# Altium PCB PCB.PcbDoc (part 11 of 11)
Units mm, origin at the board's own origin, x right, y up, seen from the top; angles counter-clockwise.
Board outline 100.46 x 70.51 mm, 10 copper layers (L1(SIG), L2(GND), L3(PWR), L4(SIG), L5(GND), L6(SIG), L7(GND), L8(SIG), L9(GND), L10(SIG)), stack 1.49 mm thick; 425 components, 324 nets, 2004 pads, 1425 vias.
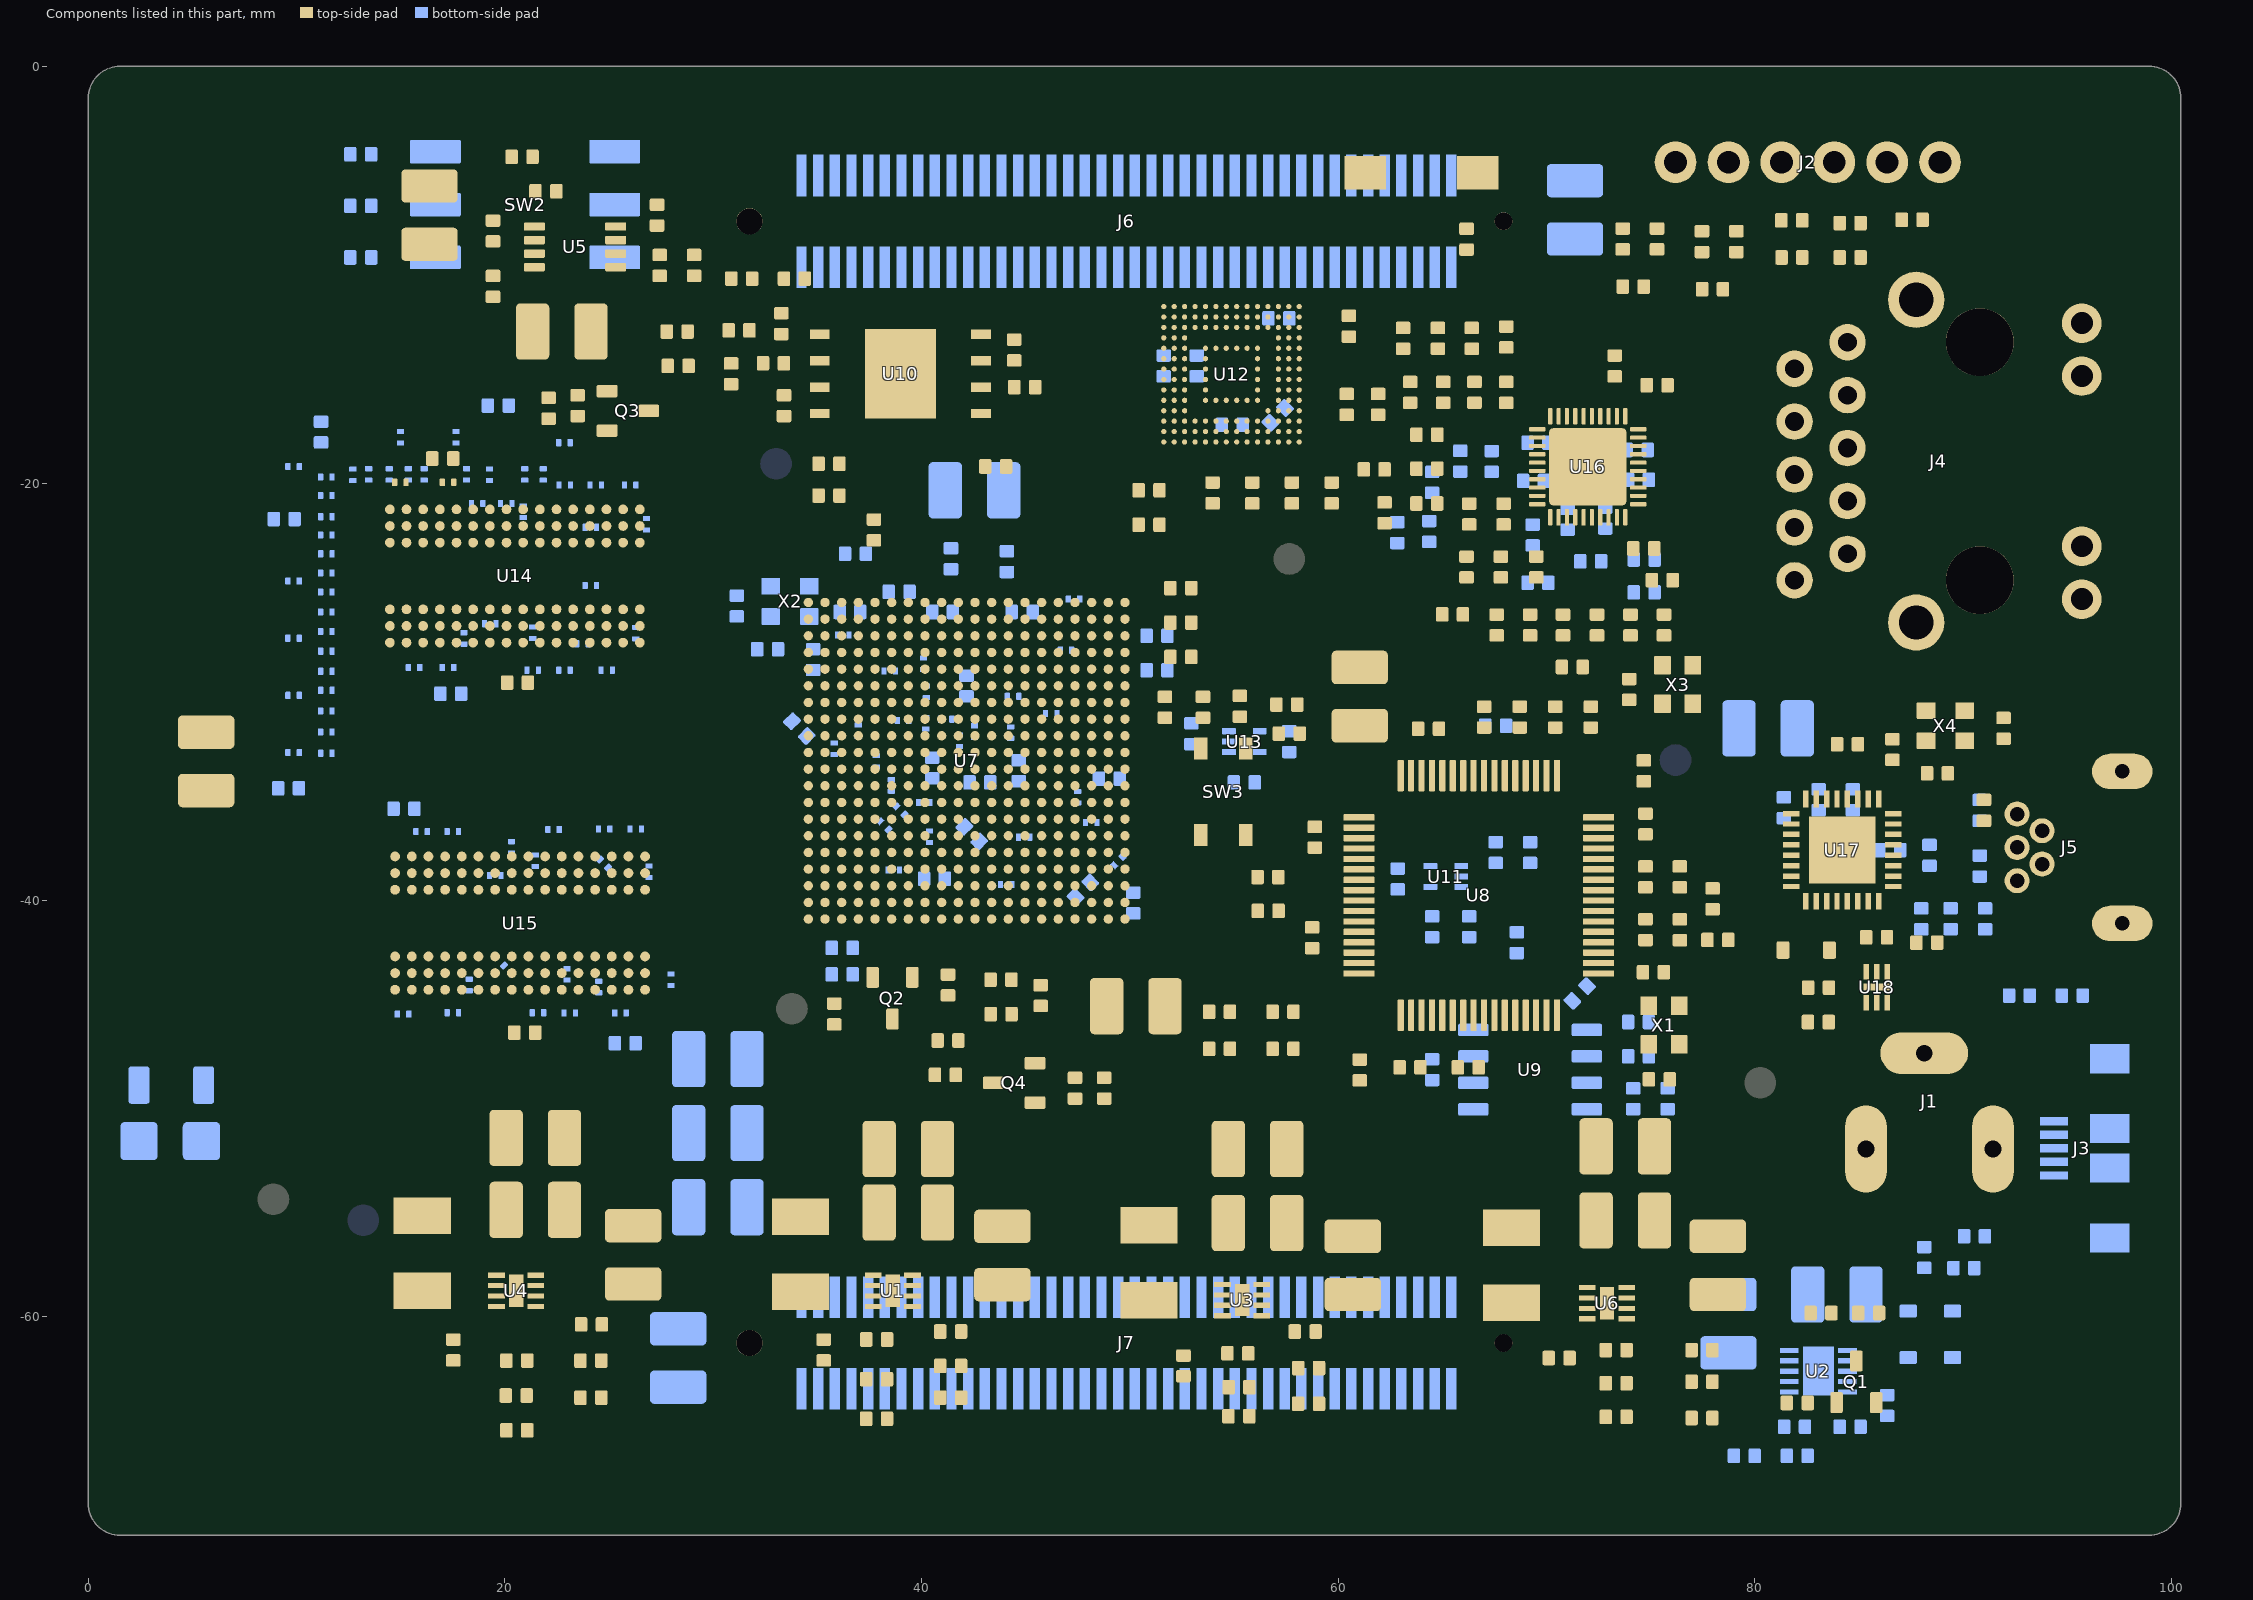
[diagram p18: the components of this part, seen from the top]

## Polygon pours and split planes (outlines as drawn) (continued)
CGND on L2(GND) "GROUND RING L2" (solid, remove dead copper, pour order 71): 89.406,-70.485 99.383,-70.485 ccw(c99.384,-68.965) 100.904,-68.965 100.904,-13.081 100.457,-13.081 100.457,-1.074 ccw(c98.937,-1.074) 98.937,0.447 88.138,0.447 1.52,0.447 ccw(c1.52,-1.073) 0,-1.073 0,-1.074 0,-8.255 -0.193,-8.255 -0.193,-68.714 -0.193,-68.715 ccw(c1.327,-68.715) 1.328,-70.235 87.887,-70.235 87.882,-67.695 11.218,-67.695 cw(c13.387,-64.071) 9.589,-65.917 9.588,-63.377 ccw(c7.048,-63.377) 7.048,-60.837 4.127,-60.837 cw(c4.032,-59.09) 3.312,-60.684 3.242,-10.083 cw(c6.163,-13.133) 4.318,-9.335 6.858,-9.335 ccw(c6.858,-6.794) 9.398,-6.794 9.398,-3.873 cw(c11.144,-3.778) 9.551,-3.058 90.818,-2.946 cw(c89.154,-3.873) 91.059,-3.873 91.059,-6.795 ccw(c93.599,-6.794) 93.599,-9.335 96.139,-9.335 cw(c94.295,-13.132) 97.446,-10.323 97.446,-17.143 97.465,-17.143 97.465,-60.448 cw(c95.717,-58.964) 96.584,-61.087 93.662,-61.087 ccw(c93.663,-63.627) 91.123,-63.627 91.122,-66.167 cw(c87.324,-64.322) 89.493,-67.945 89.411,-67.945
GND on L2(GND) "L2 GND Plane" (solid, remove dead copper, pour order 132): 0.004,-68.965 0.004,-1.947 0.004,-1.491 cw(c1.524,-1.491) 1.524,0.029 98.939,0.029 cw(c98.939,-1.491) 100.459,-1.491 100.459,-68.965 cw(c98.939,-68.965) 98.939,-70.485 1.524,-70.485 cw(c1.524,-68.965)
GND on L7(GND) "GND_L07_P151" (solid, remove dead copper, pour order 151): 0.004,-68.965 0.004,-1.947 0.004,-1.491 cw(c1.524,-1.491) 1.524,0.029 98.939,0.029 cw(c98.939,-1.491) 100.459,-1.491 100.459,-68.965 cw(c98.939,-68.965) 98.939,-70.485 1.524,-70.485 cw(c1.524,-68.965)
CGND on L7(GND) "GROUND RING L7" (solid, remove dead copper, pour order 121): 89.406,-70.485 99.383,-70.485 ccw(c99.384,-68.965) 100.904,-68.965 100.904,-13.081 100.457,-13.081 100.457,-1.074 ccw(c98.937,-1.074) 98.937,0.447 88.138,0.447 1.52,0.447 ccw(c1.52,-1.073) 0,-1.073 0,-1.074 0,-8.255 -0.193,-8.255 -0.193,-68.714 -0.193,-68.715 ccw(c1.327,-68.715) 1.328,-70.235 87.887,-70.235 87.882,-67.695 11.218,-67.695 cw(c13.387,-64.071) 9.589,-65.917 9.588,-63.377 ccw(c7.048,-63.377) 7.048,-60.837 4.127,-60.837 cw(c4.032,-59.09) 3.312,-60.684 3.242,-10.083 cw(c6.163,-13.133) 4.318,-9.335 6.858,-9.335 ccw(c6.858,-6.794) 9.398,-6.794 9.398,-3.873 cw(c11.144,-3.778) 9.551,-3.058 90.818,-2.946 cw(c89.154,-3.873) 91.059,-3.873 91.059,-6.795 ccw(c93.599,-6.794) 93.599,-9.335 96.139,-9.335 cw(c94.295,-13.132) 97.446,-10.323 97.446,-17.143 97.465,-17.143 97.465,-60.448 cw(c95.717,-58.964) 96.584,-61.087 93.662,-61.087 ccw(c93.663,-63.627) 91.123,-63.627 91.122,-66.167 cw(c87.324,-64.322) 89.493,-67.945 89.411,-67.945
GND on L6(SIG) "GND_L06_P148" (solid, remove dead copper, pour order 148): 0.004,-68.965 0.004,-1.947 0.004,-1.491 cw(c1.524,-1.491) 1.524,0.029 98.939,0.029 cw(c98.939,-1.491) 100.459,-1.491 100.459,-68.965 cw(c98.939,-68.965) 98.939,-70.485 1.524,-70.485 cw(c1.524,-68.965)
CGND on L6(SIG) "GROUND RING L6" (solid, remove dead copper, pour order 122): 89.406,-70.485 99.383,-70.485 ccw(c99.384,-68.965) 100.904,-68.965 100.904,-13.081 100.457,-13.081 100.457,-1.074 ccw(c98.937,-1.074) 98.937,0.447 88.138,0.447 1.52,0.447 ccw(c1.52,-1.073) 0,-1.073 0,-1.074 0,-8.255 -0.193,-8.255 -0.193,-68.714 -0.193,-68.715 ccw(c1.327,-68.715) 1.328,-70.235 87.887,-70.235 87.882,-67.695 11.218,-67.695 cw(c13.387,-64.071) 9.589,-65.917 9.588,-63.377 ccw(c7.048,-63.377) 7.048,-60.837 4.127,-60.837 cw(c4.032,-59.09) 3.312,-60.684 3.242,-10.083 cw(c6.163,-13.133) 4.318,-9.335 6.858,-9.335 ccw(c6.858,-6.794) 9.398,-6.794 9.398,-3.873 cw(c11.144,-3.778) 9.551,-3.058 90.818,-2.946 cw(c89.154,-3.873) 91.059,-3.873 91.059,-6.795 ccw(c93.599,-6.794) 93.599,-9.335 96.139,-9.335 cw(c94.295,-13.132) 97.446,-10.323 97.446,-17.143 97.465,-17.143 97.465,-60.448 cw(c95.717,-58.964) 96.584,-61.087 93.662,-61.087 ccw(c93.663,-63.627) 91.123,-63.627 91.122,-66.167 cw(c87.324,-64.322) 89.493,-67.945 89.411,-67.945
GND on L5(GND) "GND_L05_P150" (solid, remove dead copper, pour order 150): 0.004,-68.965 0.004,-1.947 0.004,-1.491 cw(c1.524,-1.491) 1.524,0.029 98.939,0.029 cw(c98.939,-1.491) 100.459,-1.491 100.459,-68.965 cw(c98.939,-68.965) 98.939,-70.485 1.524,-70.485 cw(c1.524,-68.965)
CGND on L5(GND) "GROUND RING L5" (solid, remove dead copper, pour order 126): 89.691,-70.516 99.668,-70.516 ccw(c99.669,-68.996) 101.189,-68.996 101.189,-13.112 100.742,-13.112 100.742,-1.105 ccw(c99.222,-1.105) 99.222,0.416 88.423,0.416 1.805,0.416 ccw(c1.805,-1.104) 0.285,-1.104 0.285,-1.105 0.285,-8.286 0.092,-8.286 0.092,-68.745 0.092,-68.746 ccw(c1.612,-68.746) 1.613,-70.266 88.172,-70.266 88.167,-67.726 11.503,-67.726 cw(c13.672,-64.102) 9.874,-65.948 9.874,-63.408 ccw(c7.333,-63.408) 7.334,-60.868 4.413,-60.868 cw(c4.317,-59.121) 3.597,-60.715 3.527,-10.114 cw(c6.448,-13.164) 4.603,-9.366 7.143,-9.366 ccw(c7.143,-6.825) 9.683,-6.826 9.683,-3.905 cw(c11.429,-3.809) 9.836,-3.089 91.103,-2.977 cw(c89.439,-3.905) 91.344,-3.905 91.344,-6.826 ccw(c93.884,-6.825) 93.884,-9.366 96.424,-9.366 cw(c94.58,-13.163) 97.731,-10.354 97.731,-17.174 97.75,-17.174 97.75,-60.479 cw(c96.002,-58.995) 96.869,-61.118 93.947,-61.118 ccw(c93.948,-63.658) 91.408,-63.658 91.407,-66.198 cw(c87.609,-64.353) 89.778,-67.976 89.696,-67.976
CGND on L5(GND) "GROUND RING L5" (solid, remove dead copper, pour order 124): 89.406,-70.485 99.383,-70.485 ccw(c99.384,-68.965) 100.904,-68.965 100.904,-13.081 100.457,-13.081 100.457,-1.074 ccw(c98.937,-1.074) 98.937,0.447 88.138,0.447 1.52,0.447 ccw(c1.52,-1.073) 0,-1.073 0,-1.074 0,-8.255 -0.193,-8.255 -0.193,-68.714 -0.193,-68.715 ccw(c1.327,-68.715) 1.328,-70.235 87.887,-70.235 87.882,-67.695 11.218,-67.695 cw(c13.387,-64.071) 9.589,-65.917 9.588,-63.377 ccw(c7.048,-63.377) 7.048,-60.837 4.127,-60.837 cw(c4.032,-59.09) 3.312,-60.684 3.242,-10.083 cw(c6.163,-13.133) 4.318,-9.335 6.858,-9.335 ccw(c6.858,-6.794) 9.398,-6.794 9.398,-3.873 cw(c11.144,-3.778) 9.551,-3.058 90.818,-2.946 cw(c89.154,-3.873) 91.059,-3.873 91.059,-6.795 ccw(c93.599,-6.794) 93.599,-9.335 96.139,-9.335 cw(c94.295,-13.132) 97.446,-10.323 97.446,-17.143 97.465,-17.143 97.465,-60.448 cw(c95.717,-58.964) 96.584,-61.087 93.662,-61.087 ccw(c93.663,-63.627) 91.123,-63.627 91.122,-66.167 cw(c87.324,-64.322) 89.493,-67.945 89.411,-67.945
CGND on Top Solder "GROUND RING L10" (solid, pour order 141): 89.406,-70.485 99.383,-70.485 ccw(c99.384,-68.965) 100.904,-68.965 100.904,-13.081 100.457,-13.081 100.457,-1.074 ccw(c98.937,-1.074) 98.937,0.447 88.138,0.447 1.52,0.447 ccw(c1.52,-1.073) 0,-1.073 0,-1.074 0,-8.255 -0.193,-8.255 -0.193,-68.714 -0.193,-68.715 ccw(c1.327,-68.715) 1.327,-70.235 88.903,-70.235 88.898,-67.31 10.677,-67.31 cw(c13.387,-64.071) 9.589,-65.917 9.588,-63.377 ccw(c7.049,-63.377) 7.048,-60.837 4.127,-60.837 cw(c4.032,-59.09) 3.312,-60.684 3.242,-10.083 cw(c6.163,-13.132) 4.318,-9.335 6.858,-9.335 ccw(c6.858,-6.794) 9.398,-6.794 9.398,-3.873 cw(c11.144,-3.778) 9.551,-3.058 90.818,-2.946 cw(c89.155,-3.873) 91.059,-3.873 91.059,-6.795 ccw(c93.599,-6.794) 93.599,-9.335 96.139,-9.335 cw(c94.295,-13.131) 97.446,-10.323 97.446,-17.143 97.465,-17.143 97.465,-60.448 cw(c95.717,-58.964) 96.584,-61.087 93.662,-61.087 ccw(c93.662,-63.627) 91.123,-63.627 91.122,-66.167 cw(c87.325,-64.322) 89.493,-67.945 89.411,-67.945
CGND on Bottom Solder "GROUND RING L10" (solid, pour order 143): 89.406,-70.485 99.383,-70.485 ccw(c99.384,-68.965) 100.904,-68.965 100.904,-13.081 100.457,-13.081 100.457,-1.074 ccw(c98.937,-1.074) 98.937,0.447 88.138,0.447 1.52,0.447 ccw(c1.52,-1.073) 0,-1.073 0,-1.074 0,-8.255 -0.193,-8.255 -0.193,-68.714 -0.193,-68.715 ccw(c1.327,-68.715) 1.328,-70.235 89.157,-70.235 89.151,-67.31 10.677,-67.31 cw(c13.387,-64.071) 9.589,-65.917 9.588,-63.377 ccw(c7.049,-63.377) 7.048,-60.837 4.127,-60.837 cw(c4.032,-59.09) 3.312,-60.684 3.242,-10.083 cw(c6.163,-13.132) 4.318,-9.335 6.858,-9.335 ccw(c6.858,-6.794) 9.398,-6.794 9.398,-3.873 cw(c11.144,-3.778) 9.551,-3.058 90.818,-2.946 cw(c89.155,-3.873) 91.059,-3.873 91.059,-6.795 ccw(c93.599,-6.794) 93.599,-9.335 96.139,-9.335 cw(c94.295,-13.131) 97.446,-10.323 97.446,-17.143 97.465,-17.143 97.465,-60.448 cw(c95.717,-58.964) 96.584,-61.087 93.662,-61.087 ccw(c93.662,-63.627) 91.123,-63.627 91.122,-66.167 cw(c87.324,-64.322) 89.493,-67.945 89.411,-67.945

## Keep-outs
Keep-Out Layer:
  the board outline again, w0.5

## Other copper
L3(PWR):
  pour cut-out: 86.338,-9.398 80.264,-9.398 80.264,-27.94 80.518,-28.194 86.338,-28.194
L4(SIG):
  pour cut-out: 38.135,-5.588 38.054,-26.263 35.965,-26.263 36.115,-29.303 36.289,-32.746 39.088,-32.651 38.993,-32.746 38.993,-33.913 39.878,-34.798 39.878,-37.846 48.768,-37.846 49.022,-38.1 49.022,-38.608 50.8,-40.386 55.88,-40.386 55.88,-40.132 55.88,-39.878 55.88,-34.544 62.738,-27.686 62.738,-16.764 61.976,-16.002 61.976,-10.16 55.118,-3.302 38.135,-3.302
L6(SIG):
  pour cut-out: 41.91,-10.414 41.91,-11.938 36.83,-17.018 36.83,-28.702 39.112,-28.702 40.894,-30.484 40.894,-32.512 44.196,-35.814 64.262,-35.814 72.644,-44.196 89.662,-44.196 89.662,-35.052 73.66,-19.05 59.944,-19.05 59.944,-14.224 61.976,-12.192 61.976,-10.414
  pour cut-out: 3.556,-27.432 3.556,-42.418 5.08,-43.942 5.08,-47.752 7.366,-50.038 18.034,-50.038 18.034,-49.572 22.86,-44.746 22.86,-41.656 25.146,-41.656 29.718,-37.084 29.718,-27.94 28.448,-26.67 28.448,-23.876 27.94,-23.876 22.606,-18.542 18.763,-18.542 16.731,-20.574 12.954,-20.574 10.16,-23.368 7.62,-23.368
L8(SIG):
  pour cut-out: 3.302,-36.576 3.302,-40.64 12.954,-50.292 33.02,-50.292 41.148,-42.164 41.148,-39.878 42.418,-38.608 42.418,-36.322 43.688,-36.322 71.374,-36.322 76.454,-31.242 76.454,-14.224 72.136,-9.906 54.61,-9.906 45.466,-19.05 42.164,-19.05 42.164,-14.732 41.402,-13.97 40.894,-14.478 40.132,-14.478 37.592,-11.938 35.306,-11.938 35.306,-14.986 34.036,-16.256 34.036,-26.162 13.716,-26.162
L10(SIG):
  pour cut-out: 49.784,-37.846 49.784,-35.56 50.292,-35.052 51.562,-35.052 60.198,-43.688 60.198,-58.674 34.564,-58.674 34.564,-55.634 39.37,-51.081 39.37,-42.164 41.175,-40.359 41.175,-39.597 42.926,-37.846
  pour cut-out: 41.901,-26.596 41.91,-26.605 41.91,-29.972 55.372,-29.972 68.58,-16.764 72.136,-16.764 74.041,-14.859 74.041,-11.557 72.898,-10.414 52.324,-10.414 48.629,-14.109 48.629,-21.729 44.958,-25.4 43.942,-25.4 43.942,-26.513
  pour cut-out: 11.684,-19.812 23.368,-19.812 23.368,-18.034 28.448,-18.034 31.496,-21.59 31.496,-27.432 36.576,-27.432 37.338,-28.194 37.338,-40.894 36.068,-40.894 32.004,-44.958 19.812,-44.958 19.812,-32.004 19.304,-31.496 17.018,-33.782 11.684,-33.782
Multi-Layer:
  pour cut-out: 18.864,-58.613 18.61,-58.613 18.229,-58.994 18.229,-59.629 18.102,-59.756
  pour cut-out: 36.947,-58.613 36.693,-58.613 36.312,-58.994 36.312,-59.629 36.185,-59.756
  pour cut-out: 71.234,-59.206 70.98,-59.206 70.599,-59.587 70.599,-60.222 70.472,-60.349
  pour cut-out: 53.721,-59.059 53.467,-59.059 53.086,-59.44 53.086,-60.075 52.959,-60.202

## Silkscreen, mask and mechanical layers (free items; w line width, h text height)
Top Overlay:
  text "JTAG" at 71.364,-5.654 h1
  text "EMMC" at 50.781,-9.973 h1
  text "" at 35.306,-10.414 h1
  text "PS LED" at 28.14,-16.512 h0.8
  text "DDR3L" at 23.41,-19.513 h1
  text "Zynq7000" at 46.203,-23.745 h1
  text "ETH" at 78.806,-26.678 h1 r90
  text "2" at 11.675,-26.991 h1
  text "RST" at 57.904,-34.61 h1
  text "DDR3L" at 23.614,-36.13 h1
  text "USB OTG" at 90.49,-41.664 h1 r90
  text "1" at 11.676,-44.263 h1
  text "TX" at 59.203,-45.581 h0.7
  text "DONE" at 44.904,-46.642 h0.5
  text "RX" at 59.174,-47.468 h0.7
  text "PL LED" at 37.03,-48.516 h0.8
  text "1V35" at 15.282,-48.977 h1
  text "1V0" at 33.52,-49.084 h1
  text "1V8" at 49.776,-49.592 h1
  text "3V3" at 67.81,-49.592 h1
  text "PWR 5V" at 82.356,-54.11 h1 r90
  text "PWR ON" at 87.622,-60.01 h1
Bottom Overlay:
  text "CONN A" at 28.953,-5.58 h1 r90
  text "TDI" at 79.248,-6.604 h1 r90
  text "TMS" at 76.197,-7.104 h1 r90
  text "TDO" at 81.277,-7.104 h1 r90
  text "TCK" at 84.071,-7.104 h1 r90
  text "+" at 90.235,-8.136 h3 r90
  text "-" at 87.63,-8.382 h3 r90
  text "MODE" at 16.772,-11.935 h1
  text "CONN B" at 70.107,-64.27 h1 r270
Dimensions:
  lines w0.5: 5.159,-0.221 98.939,-0.221 cw(c98.939,-1.491) 100.209,-1.491 100.209,-68.965 cw(c98.939,-68.965) 98.939,-70.235 1.524,-70.235 cw(c1.524,-68.965) 0.254,-68.965 0.254,-1.947 0.254,-1.491 cw(c1.524,-1.491) 1.524,-0.221 5.877,-0.221

## Text inside footprints (layer, text, board x,y; h text height)
D2: Top 3D Body "+" at 83.588,-59.312 h0.5
D8: Top 3D Body "+" at 45.706,-45.978 h0.5 r180
D11: Top 3D Body "+" at 55.475,-46.63 h0.5
D12: Top 3D Body "+" at 55.475,-44.852 h0.5
D13: Top 3D Body "+" at 30.204,-14.863 h0.5 r180
D14: Top 3D Body "+" at 39.265,-47.882 h0.5
J4: Top 3D Body "1" at 81.644,-26.368 h0.5 r270
J6: Bottom 3D Body "1" at 66.889,-5.039 h0.4; Bottom 3D Body "2" at 66.927,-9.539 h0.4
J7: Bottom 3D Body "1" at 66.889,-58.887 h0.4; Bottom 3D Body "2" at 66.927,-63.387 h0.4
SW2: Bottom Overlay "ON" at 22.043,-13.616 h0.5 r270